# Altium PCB pcb.PcbDoc
Units mm, origin at the board's own origin, x right, y up, seen from the top; angles counter-clockwise.
Board outline 16 x 19.2 mm, 2 copper layers (Top Layer, Bottom Layer), stack 1.18 mm thick; 14 components, 11 nets, 88 pads, 13 vias.
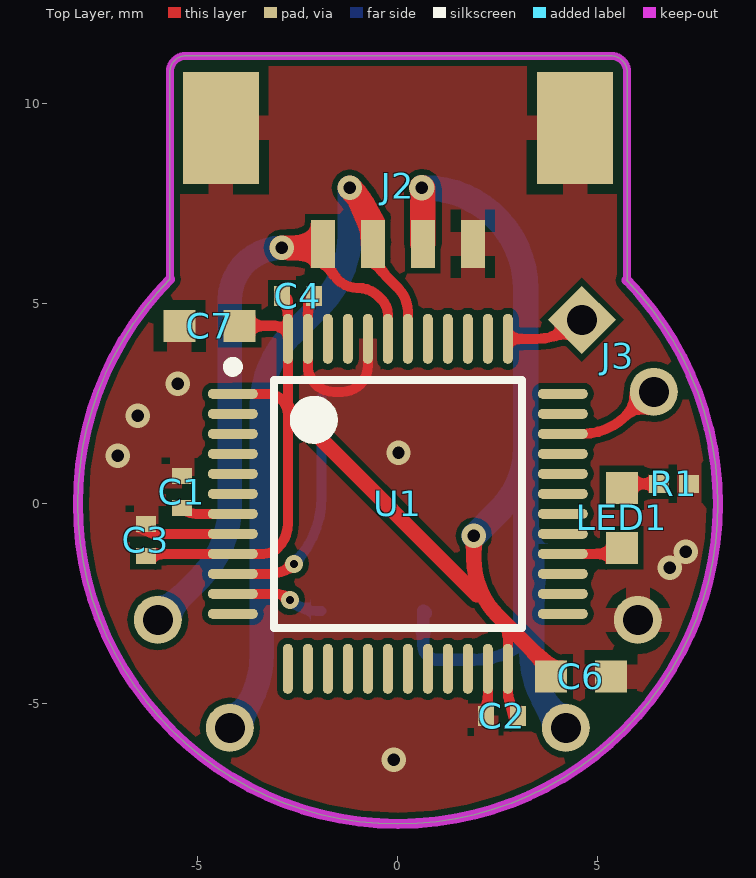
[diagram p0: Top Layer view]
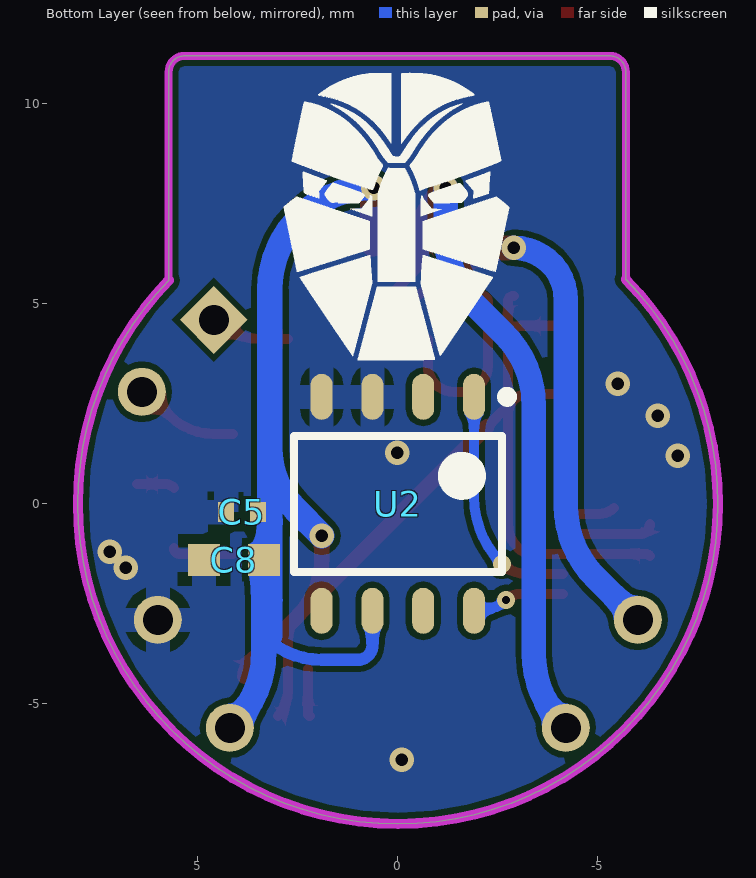
[diagram p1: Bottom Layer view, seen from below]
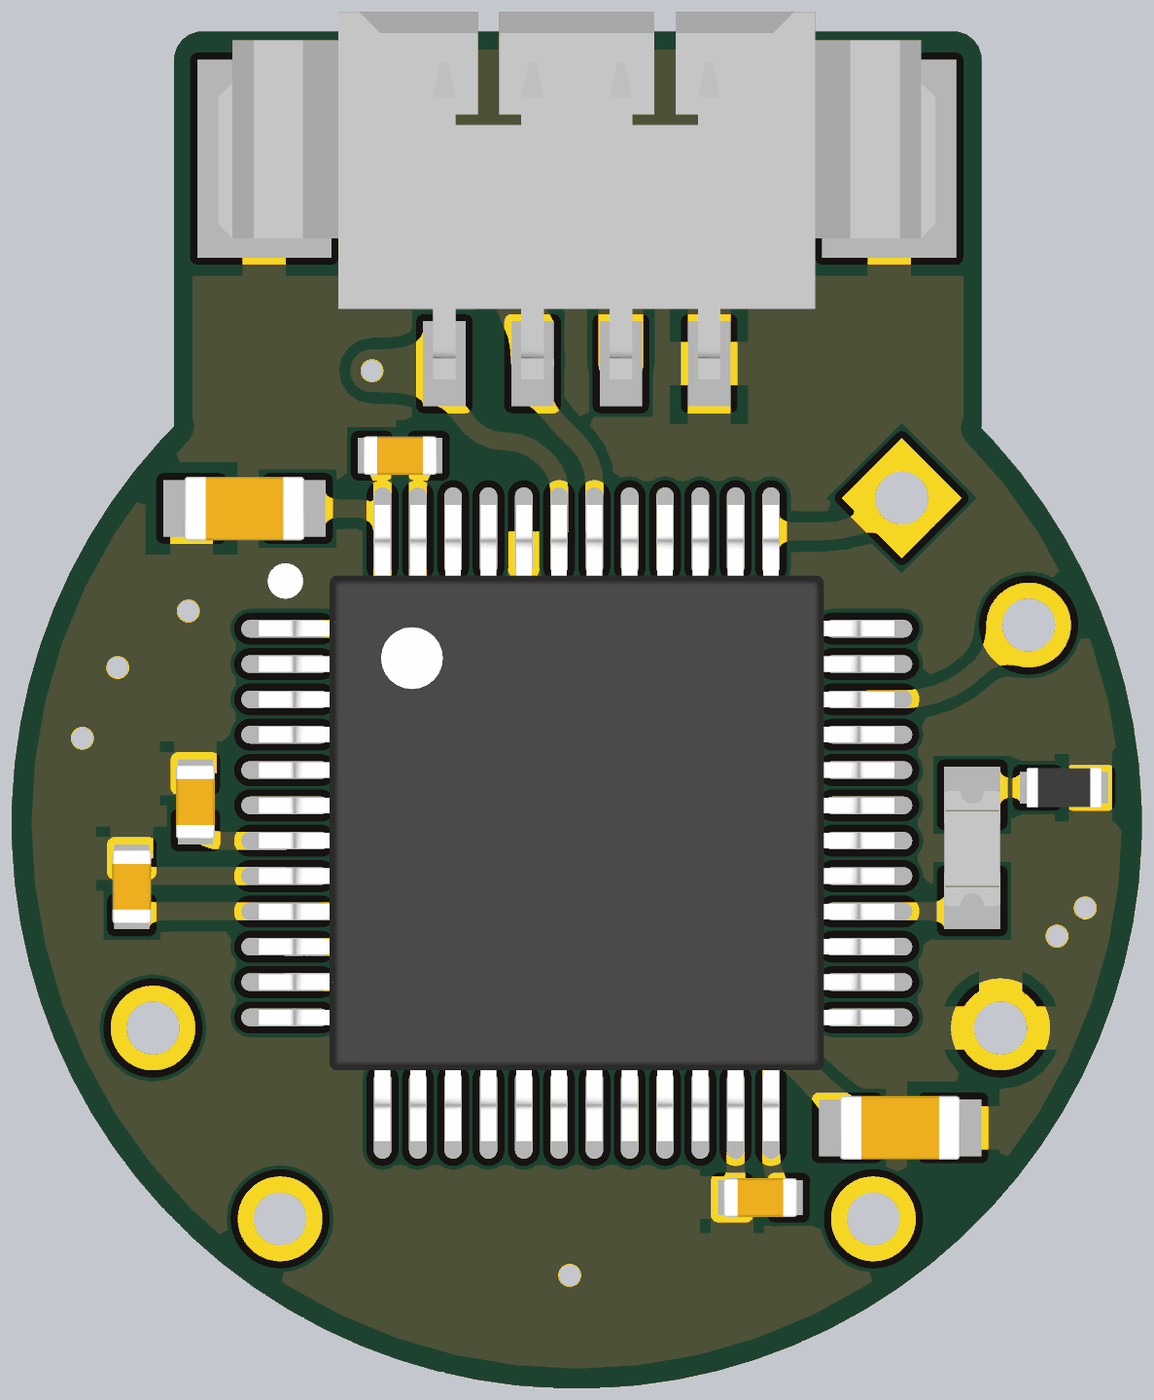
[diagram p2: 3D render of the assembled board from above, using the file's embedded part models]
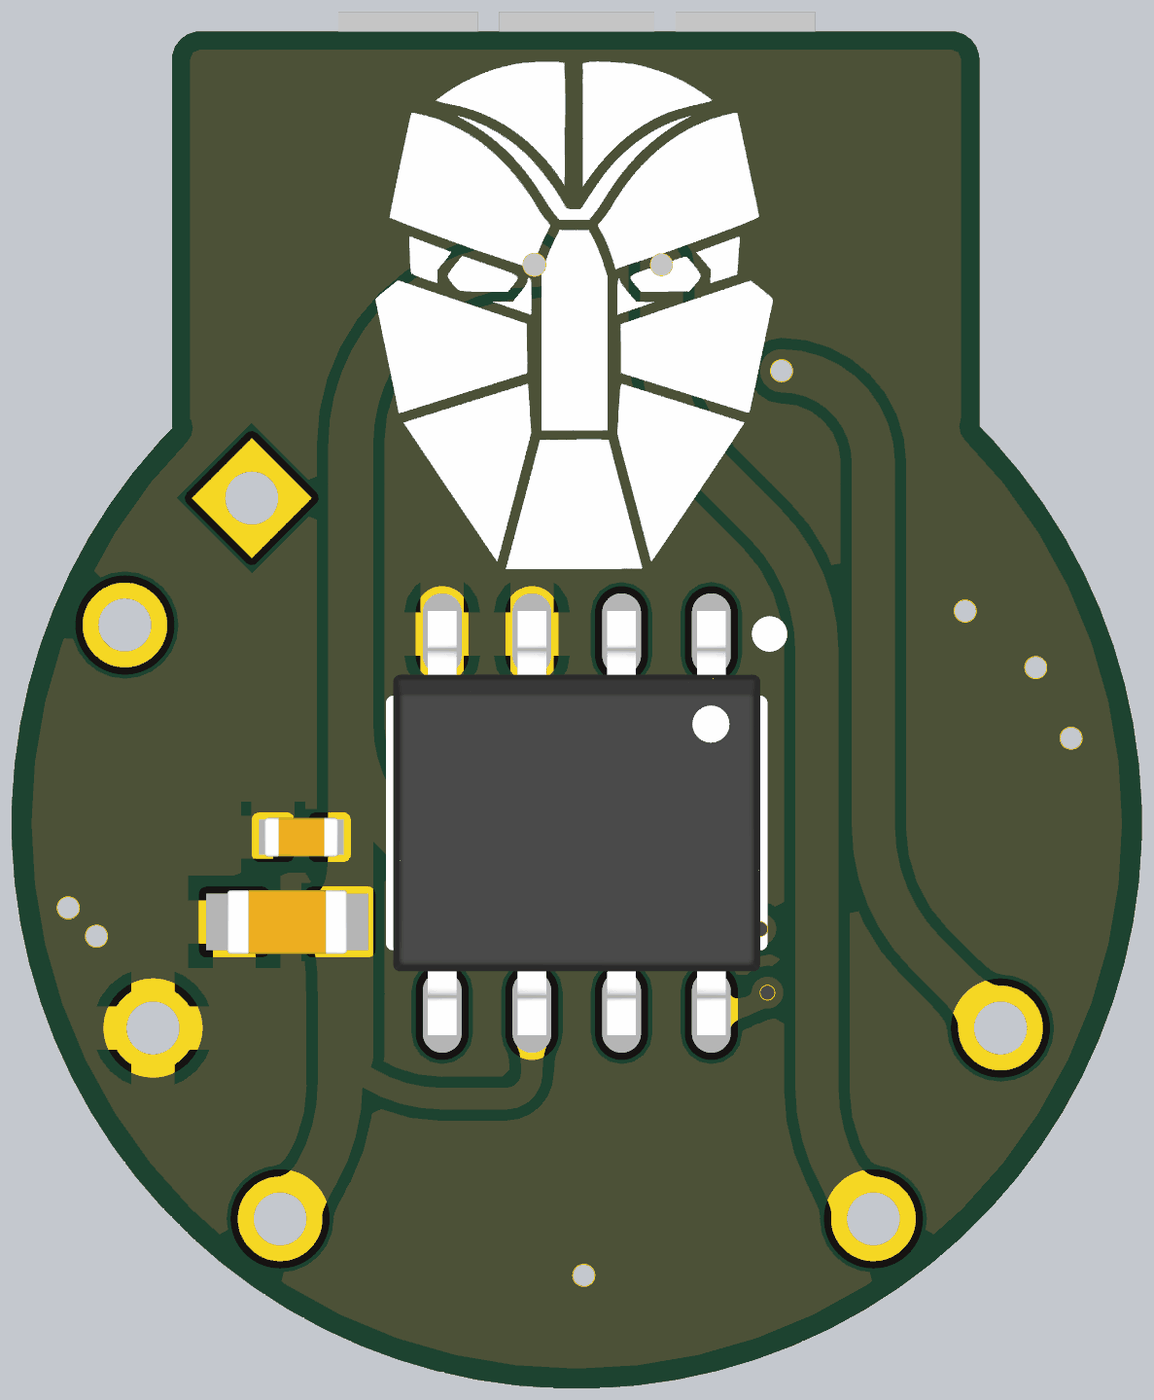
[diagram p3: 3D render of the assembled board from below, using the file's embedded part models]

## Layer stack, top to bottom
Top Solder: solder mask 0.0102, Solder Resist, Dk 3.5
Top Layer: signal copper 0.0356
Dielectric 1: dielectric 1.1086, FR-4, Dk 4.8
Bottom Layer: signal copper 0.0356
Bottom Solder: solder mask 0.0102, Solder Resist, Dk 3.5

## Board outline
-8,0 cw(c0,0) -5.7,5.613 -5.7,10.8 cw(c-5.3,10.8) -5.3,11.2 5.331,11.2 cw(c5.331,10.8) 5.731,10.8 5.731,5.6 5.722,5.591 cw(c0,0) 8,0 cw(c0,0) 0,-8 cw(c0,0)

## Design rules (kind name [scope] priority, off if disabled: settings)
Clearance [All] p1: gap=0.152 ignorepadtopadclearanceinfootprint=FALSE except(0: Arc-Hole Track-Hole SMDPad-Hole THPad-Hole Via-Hole Fill-Hole Poly-Hole Region-Hole Text-Hole)
MinimumSolderMaskSliver [All] p1 off: minsoldermaskwidth=0.254
PolygonConnect [All] p1: thpad.connectstyle=Relief thpad.reliefconductorwidth=0.61 thpad.reliefentries=4 thpad.polygonreliefangle="90 Angle" thpad.airgapwidth=0.254 smdpad.connectstyle=Relief smdpad.reliefconductorwidth=0.61 smdpad.reliefentries=4 smdpad.polygonreliefangle="90 Angle" smdpad.airgapwidth=0.254 via.connectstyle=Direct via.reliefconductorwidth=0.61 via.reliefentries=4 via.polygonreliefangle="90 Angle" via.airgapwidth=0.254
RoutingVias [All] p1: holewidth=0.711 width=1.27 viastyle="Through Hole" minholewidth=0.2 minwidth=0.45 maxholewidth=0.711 maxwidth=1.27
SilkToSilkClearance [All] p1 off: silktosilkclearance=0.254
SilkToSolderMaskClearance [IsPad] p1 off: minsilkscreentomaskgap=0.254 clearancetoexposedcopper=TRUE
SolderMaskExpansion [All] p1: expansion=0.102 istentingtop=FALSE
Width [All] p1: maxlimit=5.08 minlimit=0.152 preferedwidth=0.254 minimp=50.000000 maximp=50.000000 favimp=50.000000
27 further rules are at their usual default settings.

## Components (designator, comment, footprint, x,y, rotation, side; value= is the part's Value field where it differs from the comment)
C1 "100nF" c0402 -5.4,0.3 r90 top
C2 "100nF" c0402 2.6,-5.3 r180 top
C3 "100nF" c0402 -6.3,-0.9 r90 top
C4 "100nF" c0402 -2.5,5.2 r0 top
C5 "100nF" c0402 3.9,-0.2 r0 bottom
C6 "4.7uF" C0603 4.578,-4.312 r180 top
C7 "4.7uF" C0603 -4.705,4.451 r0 top
C8 "4.7uF" C0603 4.1,-1.4 r180 bottom
J2 "0532610471" 0532610471 0,6.5 r180 top
J3 "PIN-DUAL" PAD-DOUBLE 5.5,3.7 r315 top
LED1 "VLMTG1400-GS08" LED_0603 5.6,-0.362 r270 top
R1 "470" R0402 6.9,0.5 r0 top
U1 "STM32F030C6T6" LQFP48 0,0 r0 top locked
U2 "TLE5009E1000FUMA1" SOIC127P600X175-8L 0,0 r270 bottom

## Footprints (in the part's own frame and the unit in brackets; to place one, negate y for a bottom-side part, rotate by r counter-clockwise, add the part's x,y. Pads: shape width x height; smd on the part's side, far side on the other; paste and mask are expansions set on the pad)
0532610471 [mm]
  rect 0.6x1.2 smd: 1(1.875,0) 2(0.625,0) 3(-0.625,0) 4(-1.875,0)
  rect 1.9x2.8 smd: 5(4.425,-2.9) 6(-4.425,-2.9)
  body extent -5.07,-4.98 5.07,0.22, height 3.39
c0402 [mm] "Chip Capacitor, 2-Leads, Body 1.00x0.50mm, IPC Medium Density"
  rect 0.4x0.5 smd: 1(-0.4,0) 2(0.4,0)
  body extent -0.53,-0.28 0.53,0.28, height 0.55
C0603 [mm] "Chip Capacitor, 2-Leads, Body 1.60x0.80mm, IPC Medium Density"
  rect 0.8x0.8 smd: 1(-0.75,0) 2(0.75,0)
  body extent -0.85,-0.45 0.85,0.45, height 0.9
LED_0603 [mil]
  rect 31.5x31.5 smd: A(29.06,0) C(-30,0)
  body extent -32,-15 32,16, height 28
LQFP48 [mm] "QFP, 48-Leads, Body 7x7mm, Pitch 0.5mm, IPC Medium Density"
  oval 1.25x0.25 smd: 1(-4.125,2.75) 2(-4.125,2.25) 3(-4.125,1.75) 4(-4.125,1.25) 5(-4.125,0.75) 6(-4.125,0.25) 7(-4.125,-0.25) 8(-4.125,-0.75) 9(-4.125,-1.25) 10(-4.125,-1.75) 11(-4.125,-2.25) 12(-4.125,-2.75) 25(4.125,-2.75) 26(4.125,-2.25) 27(4.125,-1.75) 28(4.125,-1.25) 29(4.125,-0.75) 30(4.125,-0.25) 31(4.125,0.25) 32(4.125,0.75) 33(4.125,1.25) 34(4.125,1.75) 35(4.125,2.25) 36(4.125,2.75)
  oval 0.25x1.25 smd: 13(-2.75,-4.125) 14(-2.25,-4.125) 15(-1.75,-4.125) 16(-1.25,-4.125) 17(-0.75,-4.125) 18(-0.25,-4.125) 19(0.25,-4.125) 20(0.75,-4.125) 21(1.25,-4.125) 22(1.75,-4.125) 23(2.25,-4.125) 24(2.75,-4.125) 37(2.75,4.125) 38(2.25,4.125) 39(1.75,4.125) 40(1.25,4.125) 41(0.75,4.125) 42(0.25,4.125) 43(-0.25,4.125) 44(-0.75,4.125) 45(-1.25,4.125) 46(-1.75,4.125) 47(-2.25,4.125) 48(-2.75,4.125)
  silkscreen extent -4.25,-3.1 3.1,3.55, body extent -4.5,-4.5 4.5,4.5, height 1.6
PAD-DOUBLE [mm]
  rect 1.2x1.2 hole 0.75: 1(-1.27,0)
  round 1.2 hole 0.75: 2(1.27,0)
R0402 [mm] "Chip Resistor, 2-Leads, Body 1.00x0.50mm, IPC High Density"
  rect 0.5x0.45 smd: 1(-0.375,0) 2(0.375,0)
  body extent -0.52,-0.27 0.53,0.28, height 0.5
SOIC127P600X175-8L [mm] "SOIC, 8-Leads, Body 5.00x4.00mm, Pitch 1.27mm, IPC High Density"
  oval 1.15x0.55 smd: 1(-2.675,1.905) 2(-2.675,0.635) 3(-2.675,-0.635) 4(-2.675,-1.905) 5(2.675,-1.905) 6(2.675,-0.635) 7(2.675,0.635) 8(2.675,1.905)
  silkscreen extent -2.8,-2.6 1.7,2.85, body extent -3,-2.6 3,2.6, height 1.75

## Part data
C1 C2 C3 C4 C5: library part C0402-100nF, "SAMSUNG ELECTRO-MECHANICS - CL05F104ZO5NNNC - SMD Multilayer Ceramic Capacitor, 0.1 µF, 16 V, 0402 [1005 Metric], +80%, -20%, Y5V, CL Series", Case Code (Imperial)=0402, Case Code (Metric)=1005, Dielectric=Y5V, Manufacturer=Samsung, Manufacturer Part Number=CL05F104ZO5NNNC, Max Operating Temperature=85°C, Min Operating Temperature=-30°C, Supplier Part Number 1=1276-1004-1-ND, Tolerance=80%, Voltage Rating=16V, Capacitance=100nF, Case/Package=0402, Category="Ceramic Capacitors", ComponentLink1Description=https://datasheet.ciiva.com/16199/cl05f104zo5nnnc-16199056.pdf?src-supplier=Future+Electronics, ComponentLink1URL=https://datasheet.ciiva.com/16199/cl05f104zo5nnnc-16199056.pdf?src-supplier=Future+Electronics, ComponentLink2Description=https://datasheet.ciiva.com/15195/getdatasheetpartid-358403-15195703.pdf?src-supplier=Verical, ComponentLink2URL=https://datasheet.ciiva.com/15195/getdatasheetpartid-358403-15195703.pdf?src-supplier=Verical, ComponentLink3Description=https://datasheet.ciiva.com/29198/458504-da-01-en-vs-kondensator-0402-29198386.pdf?src-supplier=Conrad, ComponentLink3URL=https://datasheet.ciiva.com/29198/458504-da-01-en-vs-kondensator-0402-29198386.pdf?src-supplier=Conrad, Contact Plating=Tin, Depth=0.5mm, Height=0.5mm, Length=1mm, Material=Ceramic, Mount="Surface Mount", Packaging="Tape and Reel", Pricing 1="1=0.10000, 10=0.01900, 50=0.01040, 100=0.00850, 500=0.00604, 1000=0.00475, 2500=0.00432, 5000=0.00397 (USD)", Radiation Hardening=No, RoHS=Yes, Stock 1=4278518, Supplier 1=Digi-Key, Thickness=0.022inch, Width=0.02inch
C6 C7 C8: library part C0603-4.7uF, "Cap Ceramic 4.7uF 6.3VDC X5R 10% SMD 0603 Paper T/R", Case Code (Imperial)=0603, Case Code (Metric)=1608, Dielectric=X5R, Manufacturer=Samsung, Manufacturer Part Number=CL10A475KQ8NNNC, Max Operating Temperature=85°C, Min Operating Temperature=-55°C, Package Quantity=1, Supplier Part Number 1=1276-1045-1-ND, Tolerance=20%, Voltage=6.3V, Capacitance=4.7uF, Case/Package=0603, Category="Ceramic Capacitors", ComponentLink1Description=https://datasheet.ciiva.com/15195/getdatasheetpartid-358620-15195714.pdf?src-supplier=Verical, ComponentLink1URL=https://datasheet.ciiva.com/15195/getdatasheetpartid-358620-15195714.pdf?src-supplier=Verical, ComponentLink2Description=https://datasheet.ciiva.com/29198/457675-da-01-en-vs-kondensator-0603-29198672.pdf?src-supplier=Conrad, ComponentLink2URL=https://datasheet.ciiva.com/29198/457675-da-01-en-vs-kondensator-0603-29198672.pdf?src-supplier=Conrad, ComponentLink3Description=https://datasheet.ciiva.com/16437/cl05b104kq5nnnc-16437321.pdf?src-supplier=Future+Electronics, ComponentLink3URL=https://datasheet.ciiva.com/16437/cl05b104kq5nnnc-16437321.pdf?src-supplier=Future+Electronics, Contact Plating=Tin, Depth=0.8mm, Height=0.8mm, Length=1.6mm, Material=Ceramic, Mount="Surface Mount", Packaging="Tape and Reel", Pricing 1="1=0.10000, 10=0.04500, 50=0.02480, 100=0.02030, 500=0.01448, 1000=0.01137 (USD)", Radiation Hardening=No, RoHS=Yes, Stock 1=1192818, Supplier 1=Digi-Key, Thickness=0.035inch, Voltage Rating=6.3V, Width=0.031inch
J2: "Headers & Wire Housings 1.25MM HDR 4 CKT Right-Angle", Color=Beige, Contact Resistance=20mR, Current Rating=1A, Flammability Rating="UL94 V-0", Insulation Resistance=100MR, Manufacturer=Molex, Manufacturer Part Number=53261-0471, Max Operating Temperature=85°C, Min Operating Temperature=-40°C, Package Quantity=1000, Supplier Part Number 1=WM7622DKR-ND, Voltage Rating=125V, ComponentLink1Description=http://www.mouser.com/ds/2/276/0532610471_PCB_HEADERS-170942.pdf, ComponentLink1URL=http://www.mouser.com/ds/2/276/0532610471_PCB_HEADERS-170942.pdf, ComponentLink2Description=http://uk.rs-online.com/webdocs/1380/0900766b8138010d.pdf, ComponentLink2URL=http://uk.rs-online.com/webdocs/1380/0900766b8138010d.pdf, ComponentLink3Description=http://www.farnell.com/datasheets/1867384.pdf, ComponentLink3URL=http://www.farnell.com/datasheets/1867384.pdf, ComponentLink4Description=http://www.molex.com/webdocs/datasheets/pdf/en-us/0532610471_PCB_HEADERS.pdf, ComponentLink4URL=http://www.molex.com/webdocs/datasheets/pdf/en-us/0532610471_PCB_HEADERS.pdf, ComponentLink5Description=https://www.alliedelec.com/m/d/74d14d19c60ab078e4881c4c1bd42ef7.pdf, ComponentLink5URL=https://www.alliedelec.com/m/d/74d14d19c60ab078e4881c4c1bd42ef7.pdf, ComponentLink6Description=http://www.jameco.com/Jameco/Products/ProdDS/1932555.pdf, ComponentLink6URL=http://www.jameco.com/Jameco/Products/ProdDS/1932555.pdf, Contact Material=Bronze,Tin, Contact Plating=Tin, Description 1="Headers & Wire Housings 1.25MM HDR 4 CKT Right-Angle", Gender=Male, Glow Wire Compliant=Non-compliant, Housing Material=Thermoplastic, Lead Free="Lead Free", Lead Pitch=1.25mm, Mount="Surface Mount", Number of Circuits=4, Number of Contacts=4, Number of Positions=4, Number of Rows=1, Orientation="Right Angle", Packaging="Tape and Reel", Pitch=1.25mm, Pricing="1=1.24, 10=1.089, 100=0.9397, 500=0.76884 (USD)", Radiation Hardening=No, REACH SVHC=Unknown, Stock=42057, Supplier 1=Digi-Key, Termination=SMD/SMT, Voltage Rating (AC)=125V, Voltage Rating (DC)=125V, Working Voltage=125V
LED1: "LED GREEN 0603 SMD", Case Code (Imperial)=0603, Case Code (Metric)=1608, Color=Green, Forward Voltage=2.85V, Manufacturer=Vishay, Supplier Part Number 1=VLMTG1400-GS08CT-ND, Test Current=20mA, Case/Package=0603, Category=LEDs, ComponentLink1Description=http://www.farnell.com/datasheets/2614507.pdf?src-supplier=Farnell, ComponentLink1URL=http://www.farnell.com/datasheets/2614507.pdf?src-supplier=Farnell, ComponentLink2Description=http://www.vishay.com/docs/84393/vlmtg1400.pdf?src-supplier=Digi-Key, ComponentLink2URL=http://www.vishay.com/docs/84393/vlmtg1400.pdf?src-supplier=Digi-Key, Dominant Wavelength=525nm, Height=0.65mm, Length=1.6mm, Lens Size=0.8mm, Lens Style=Flat, Luminous Intensity=1400mcd, Manufacturer Part Number=VLMTG1400-GS08, Mount="Surface Mount", Packaging="Cut Tape", Pricing 1="1=0.48000, 10=0.34300, 100=0.22400, 500=0.16100, 1000=0.12600 (USD)", RoHS=No, Stock 1=1146, Supplier 1=Digi-Key, Viewing Angle=146°, Width=0.8mm
R1: library part RC0402JR-07470RL, "RES 680 OHM 5% 1/16W 0402", Case Code (Imperial)=0402, Case Code (Metric)=1005, Manufacturer=Yageo, Max Operating Temperature=155°C, Max Power Dissipation=63mW, Min Operating Temperature=-55°C, Package Quantity=1, Power Rating=62.5mW, Resistance=470R, Supplier Part Number 1=311-470JRDKR-ND, Temperature Coefficient=100ppm/°C, Tolerance=5%, Voltage Rating=50V, Case/Package=0402, Category="Chip SMD Resistors", ComponentLink1Description=http://www.yageo.com/documents/recent/PYu-RC_Group_51_RoHS_L_10.pdf?src-supplier=Digi-Key, ComponentLink1URL=http://www.yageo.com/documents/recent/PYu-RC_Group_51_RoHS_L_10.pdf?src-supplier=Digi-Key, ComponentLink2Description=http://www.farnell.com/datasheets/1018594.pdf?src-supplier=Element14, ComponentLink2URL=http://www.farnell.com/datasheets/1018594.pdf?src-supplier=Element14, ComponentLink3Description=http://www.mouser.com/ds/2/447/PYu-RC0402_51_RoHS_L_6_r-8721.pdf?src-supplier=Mouser, ComponentLink3URL=http://www.mouser.com/ds/2/447/PYu-RC0402_51_RoHS_L_6_r-8721.pdf?src-supplier=Mouser, ComponentLink4Description=https://www.seielect.com/catalog/SEI-Packaging.pdf?src-supplier=Digi-Key, ComponentLink4URL=https://www.seielect.com/catalog/SEI-Packaging.pdf?src-supplier=Digi-Key, ComponentLink5Description=https://www.seielect.com/catalog/SEI-RMCF_RMCP.pdf?src-supplier=Avnet, ComponentLink5URL=https://www.seielect.com/catalog/SEI-RMCF_RMCP.pdf?src-supplier=Avnet, ComponentLink6Description=http://www.seielect.com/Catalog/SEI-RMC.pdf?src-supplier=Future+Electronics, ComponentLink6URL=http://www.seielect.com/Catalog/SEI-RMC.pdf?src-supplier=Future+Electronics, Composition="Thick Film", Contact Plating=Tin,Matte, Depth=0.5mm, Description 1="RES SMD 470 OHM 5% 1/16W 0402", Features="Moisture Resistant", Height=0.016inch, Lead Free="Lead Free", Length=1mm, Manufacturer Part Number=RC0402JR-07470RL, Military Standard=Not, Mount="Surface Mount", Number of Terminations=2, Packaging="Tape and Reel", Pricing="1=0.1, 10=0.013, 100=0.0055, 1000=0.00245, 2500=0.00212, 5000=0.00176 (USD)", Pricing 2="1=0.10000, 10=0.01100, 100=0.00450, 1000=0.00204, 2500=0.00177, 5000=0.00146 (USD)", Radiation Hardening=No, REACH SVHC=Unknown, RoHS=Yes, Stock=2903670, Stock 2=241664, Supplier 1=Digi-Key, Supplier 2=Digi-Key, Supplier Part Number 2=RMCF0402JT680RCT-ND, Termination=SMD/SMT, Width=0.02inch, Working Voltage=50V
U1: "STMICROELECTRONICS - STM32F030C6T6 - ARM MCU, Value Line, STM32 Family STM32F0 Series Microcontrollers, ARM Cortex-M0, 32bit, 48 MHz - ARM MCU, Value Line, STM32 Family STM32F0 Series Microcontrollers, ARM Cortex-M0, 32bit, 48 MHz", Case/Package=LQFP, Frequency=48MHz, I/Os (High Current)=39, Manufacturer=STMicroelectronics, Max Operating Temperature=85°C, Max Power Dissipation=364mW, Max Supply Voltage=3.6V, Min Operating Temperature=-40°C, Min Supply Voltage=2.4V, Operating Frequency(F) (Processor speed) (MHz)=48, Package Quantity=250, Supplier Part Number 1=497-14042-ND, Supply Voltage(Vcc) min (V)=2.4, Category=Microcontrollers, ComponentLink1Description="Manufacturer URL", ComponentLink1URL=http://www.st.com/web/en/home.html, ComponentLink2Description=Datasheet, ComponentLink2URL=http://www.st.com/st-web-ui/static/active/en/resource/technical/document/datasheet/DM00088500.pdf, ComponentLink3Description="Package Specification", ComponentLink3URL=http://www.st.com/st-web-ui/static/active/en/resource/technical/document/datasheet/DM00058181.pdf, ComponentLink4Description=https://datasheet.ciiva.com/29720/dm00088500-29720640.pdf?src-supplier=Avnet, ComponentLink4URL=https://datasheet.ciiva.com/29720/dm00088500-29720640.pdf?src-supplier=Avnet, ComponentLink5Description=https://datasheet.ciiva.com/28647/1883133-28647788.pdf?src-supplier=Element14, ComponentLink5URL=https://datasheet.ciiva.com/28647/1883133-28647788.pdf?src-supplier=Element14, Contact Plating=Tin,Matte, Core="ARM Cortex-M0", Core Architecture=ARM, Data Bus Width=32b, DatasheetVersion="Rev. 1", FLASH Size (Prog) (kB)=32, Height=1.45mm, Interface=I2C,SPI,UART,USART, Internal RAM Size (kB)=4, Lead Free="Lead Free", Length=7.2mm, Manufacturer Part Number=STM32F030C6T6, Max Frequency=48MHz, Memory Size=32KB, Memory Type=FLASH, Mounting Technology="Surface Mount", Number of ADC Channels=16, Number of I2C Channels=1, Number of I/Os=39, Number of Pins=48, Number of Programmable I/O=39, Number of PWM Channels=6, Number of SPI Channels=1, Number of Timers/Counters=5, Oscillator Type=Internal, PackageDescription="48-Pin Low Profile Quad Flat Package, 7 x 7 mm Body, 0.5 mm Pitch", PackageReference=LQFP48, PackageVersion="Rev. 6, 06/2013", Packaging=Tray, Packing=Tray, PartNumber=STM32F030C6T6, Peripherals=POR,PWM,WDT,DMA, Pricing 1="1=1.48000, 10=1.32900, 25=1.25400, 100=1.06840, 250=1.00320, 500=0.87780, 1000=0.72732, 2500=0.67716, 5000=0.65208 (USD)", Radiation Hardening=No, RAM Size=4KB, REACH SVHC="No SVHC", RoHS=Yes, Stock 1=262, Supplier 1=Digi-Key, Supplier 2=Newark, Supplier 3=Mouser, Supplier Part Number 2=06X3646, Supplier Part Number 3=511-STM32F030C6T6, Watchdog Timer=Yes, Width=7.2mm
U2: "RotaryPosition Sensor 5.5V Automotive 8-Pin DSO Tape and Reel", Case/Package=SMD/SMT, Manufacturer=Infineon, Max Operating Temperature=150°C, Min Operating Temperature=-40°C, Operating Supply Voltage=3.3V, Supplier Part Number 1=TLE5009E1000FUMA1CT-ND, Category=Sensors, ComponentLink1Description=http://components.arrow.com/part/dataview/52121057S8968538N2051?src-supplier=Arrow, ComponentLink1URL=http://components.arrow.com/part/dataview/52121057S8968538N2051?src-supplier=Arrow, ComponentLink2Description=http://components.arrow.com/part/dataview/0323_03444430?src-supplier=Arrow+Europe, ComponentLink2URL=http://components.arrow.com/part/dataview/0323_03444430?src-supplier=Arrow+Europe, ComponentLink3Description=http://www.infineon.com/dgdl/Infineon-TLE5009_FDS-DS-v01_01-en.pdf?fileId=db3a304330f686060131421d8ddd56b0&src-supplier=Digi-Key, ComponentLink3URL=http://www.infineon.com/dgdl/Infineon-TLE5009_FDS-DS-v01_01-en.pdf?fileId=db3a304330f686060131421d8ddd56b0&src-supplier=Digi-Key, ComponentLink4Description=http://www.infineon.com/dgdl/TLE5009_PDS_Rev0.9.pdf?folderId=db3a30431ce5fb52011d3dd6e8012582&fileId=db3a304330f686060131421d8ddd56b0&src-supplier=Avnet, ComponentLink4URL=http://www.infineon.com/dgdl/TLE5009_PDS_Rev0.9.pdf?folderId=db3a30431ce5fb52011d3dd6e8012582&fileId=db3a304330f686060131421d8ddd56b0&src-supplier=Avnet, Halogen Free="Not Halogen Free", Interface=Analog, Lead Free="Lead Free", Manufacturer Part Number=TLE5009E1000FUMA1, Mount="Surface Mount", Number of Pins=8, Pricing 1="1=3.40000, 5=3.15600, 10=2.62200, 25=2.18480, 50=1.94220, 100=1.84510, 500=1.55372, 1000=1.45662 (USD)", RoHS=Yes, Sensing Method=Magnetoresistive, Stock 1=2450, Supplier 1=Digi-Key, Termination=SMD/SMT

## Free pads (board coordinates)
  round 1.2 hole 0.75: 1(-4.2,-5.6) 2(-6,-2.9) 3(4.2,-5.6) 4(6,-2.9)

## Via types
v1: diameter 0.61, hole 0.305, Top Layer to Bottom Layer, tented both sides, 10 vias
v2: diameter 0.45, hole 0.2, Top Layer to Bottom Layer, tented both sides, 2 vias
v3: diameter 0.635, hole 0.318, Top Layer to Bottom Layer, tented both sides, 1 vias

## Nets (pads, with @x,y where several pads share a name; then routed paths per layer and width w, separated by ;. In a path a pad name is that pad's centre, name@x,y a point inside that pad or via, vN(x,y) a via of type N, cw(c..) or ccw(c..) an arc to the next point about the centre after c; other vN are vias at no path point)
3V3: C2.1 C3.1 C4.1 C5.1 C6.2 C7.2 C8.2 J2.3 pad.3 U1.1 U1.9 U1.24 U1.48 U2.6 | length 51.7
  Top Layer w0.254: C3.1 cw(c-6.179,-1.421) -6.179,-1.25 U1.9 -3.362,-1.25 ccw(c-3.362,-0.738) -3,-1.1 ccw(c-3.604,-0.496) -2.75,-0.496 -2.75,2.238 ; U1.1 -3.262,2.75 cw(c-3.262,2.238) -2.9,2.6 cw(c-3.262,2.238) -2.75,2.238 ; C7.2 -3.076,4.451 cw(c-3.076,4.125) U1.48 ; C4.1 cw(c-2.9,5.05) -2.75,5.05 U1.48 ; -2.231,1.93 -2.665,2.363 cw(c-2.461,2.568) -2.75,2.568 ; 2.499,-2.801 cw(c1.892,-3.407) 2.75,-3.407 U1.24 2.75,-4.696 ccw(c3.604,-4.696) C2.1 ; -2.75,2.238 -2.75,2.568 ; -2.75,2.568 U1.48
  Top Layer w0.381: -2.231,1.93 1.971,-2.273 ; v1(1.9,-0.8) 1.9,-1.355 ccw(c3.944,-1.355) 2.071,-2.173 ccw(c3.944,-1.355) 2.499,-2.801 3.699,-4.001 cw(c3.388,-4.312) C6.2
  Top Layer w0.635: v3(0.6,7.9) cw(c0.6,7.875) 0.625,7.875 J2.3
  Bottom Layer w0.305: U2.6@0.7,-2.74 ccw(c0.635,-2.74) U2.6 0.635,-3.535 ccw(c1,-3.535) 1,-3.9 1.901,-3.9 ccw(c1.901,-1.851) 3.181,-3.452 ccw(c1.901,-1.851) 3.35,-3.3
  Bottom Layer w0.635: v3(0.6,7.9) 0.66,7.9 cw(c0.66,5.36) 3.2,5.36 3.2,1.4 ; v1(1.9,-0.8) 2.564,-0.136 ccw(c1.027,1.4) 3.2,1.4 ; 3.2,-3.3 3.2,1.4 ; C8.2 3.35,-3.3 3.35,-3.698 ccw(c5.89,-3.698) 4.094,-5.494 pad.3
COS: U1.10 U2.1 | length 6
  Top Layer w0.254: U1.10 -3.204,-1.75 ccw(c-3.204,-0.896) v2(-2.6,-1.5)
  Bottom Layer w0.254: v2(-2.6,-1.5) ccw(c-4.278,0.178) -1.905,0.178 U2.1
GND: C1.2 C2.2 C3.2 C4.2 C5.2 C6.1 C7.1 C8.1 J2.4 J2.5 J2.6 pad.4 R1.2 U1.8 U1.23 U1.44 U1.47 U2.3 U2.4 | length 8.3
  Top Layer w0.254: C3.2 ccw(c-6.05,-0.5) -6.05,-0.75 U1.8 ; C4.2 ccw(c-2.1,5.05) -2.25,5.05 U1.47 -2.25,3.45 ccw(c-1.6,3.45) -1.6,2.8 -1.4,2.8 ccw(c-1.4,3.45) -0.75,3.45 U1.44 ; C2.2 ccw(c2.2,-5.25) 2.25,-5.25 U1.23
  other v1: -0.1,-6.4 6.8,-1.6 7.2,-1.2 -7,1.2 0.017,1.275 -6.5,2.2 -5.5,3
NetC1_1: C1.1 U1.7 | length 1.3
  Top Layer w0.254: C1.1 ccw(c-5.038,0.262) -5.038,-0.25 U1.7
NetJ3_1: J3.1 U1.37 | length 2
  Top Layer w0.254: U1.37 3.46,4.125 ccw(c3.46,5.74) J3.1
NetJ3_2: J3.2 U1.34 | length 2.7
  Top Layer w0.254: U1.34 4.614,1.75 ccw(c4.614,3.286) 5.7,2.2 J3.2@6.383,2.883
NetLED1_A: LED1.A U1.28 | length 1.6
  Top Layer w0.254: U1.28 5.45,-1.25 ccw(c5.45,-1.1) LED1.A
NetLED1_C: LED1.C R1.1 | length 1
  Top Layer w0.254: LED1.C cw(c5.841,0.159) 5.768,0.492 cw(c5.841,0.159) 5.841,0.5 R1.1
SCL: J2.2 pad.1 U1.42 | length 18.6
  Top Layer w0.254: J2.2 ccw(c0.522,6.5) -0.289,5.689 0,5.4 cw(c-0.604,4.796) 0.25,4.796 U1.42
  Top Layer w0.61: v1(-1.2,7.9) cw(c-2.588,6.512) -0.625,6.512 J2.2
  Bottom Layer w0.61: pad.1 -4.144,-5.544 ccw(c-5.94,-3.748) -3.4,-3.748 -3.4,2.448 cw(c-0.86,2.448) -2.656,4.244 -1.944,4.956 ccw(c-3.74,6.752) -1.9,5.001 ccw(c-3.74,6.752) -1.2,6.752 v1(-1.2,7.9)
SDA: J2.1 pad.2 U1.43 | length 15
  Top Layer w0.254: J2.1 ccw(c-0.608,6.5) -1.504,5.604 -1.5,5.6 ccw(c-1.017,6.083) -1.017,5.4 -1,5.4 cw(c-1,4.676) -0.488,5.188 -0.4,5.1 cw(c-0.762,4.738) -0.25,4.738 U1.43
  Top Layer w0.61: v1(-2.9,6.4) -2.116,6.4 ccw(c-2.116,6.741) J2.1
  Bottom Layer w0.61: pad.2 -4.944,-1.844 ccw(c-6.74,-0.048) -4.2,-0.048 -4.2,5.1 cw(c-2.9,5.1) v1(-2.9,6.4)
SIN: U1.11 U2.8 | length 2.3
  Top Layer w0.254: U1.11 -3.062,-2.25 cw(c-3.062,-2.762) v2(-2.7,-2.4)
  Bottom Layer w0.254: v2(-2.7,-2.4) ccw(c-2.036,-1.736) -2.036,-2.675 U2.8
pads on no net: U1.2 U1.3 U1.4 U1.5 U1.6 U1.12 U1.13 U1.14 U1.15 U1.16 U1.17 U1.18 U1.19 U1.20 U1.21 U1.22 U1.25 U1.26 U1.27 U1.29 U1.30 U1.31 U1.32 U1.33 U1.35 U1.36 U1.38 U1.39 U1.40 U1.41 U1.45 U1.46 U2.2 U2.5 U2.7

## Polygon pours and split planes (outlines as drawn)
GND on Bottom Layer "GND_L02_P001" (solid, remove dead copper, pour order 1): -3.8,15.3 -13.86,15.3 ccw(c-13.86,12.76) -16.4,12.76 -16.4,-10.26 ccw(c-13.86,-10.26) -13.86,-12.8 15.46,-12.8 ccw(c15.46,-10.26) 18,-10.26 18,12.26 ccw(c15.46,12.26) 15.46,14.8 -2.2,14.8
GND on Top Layer "GND_L01_P000" (solid, remove dead copper, pour order 0): -4.3,15 -14.36,15 ccw(c-14.36,12.46) -16.9,12.46 -16.9,-10.56 ccw(c-14.36,-10.56) -14.36,-13.1 14.96,-13.1 ccw(c14.96,-10.56) 17.5,-10.56 17.5,11.96 ccw(c14.96,11.96) 14.96,14.5 -2.7,14.5

## Keep-outs
Keep-Out Layer:
  lines w0.2: -5.7,5.6 -5.7,10.8 cw(c-5.3,10.8) -5.3,11.2 5.331,11.2 cw(c5.331,10.8) 5.731,10.8 5.731,5.6
  lines w0.254: -5.7,5.613 ccw(c0,0) -8,0 ccw(c0,0) 0,-8 ccw(c0,0) 8,0 ccw(c0,0) 5.722,5.591

## Silkscreen, mask and mechanical layers (free items; w line width, h text height)
Bottom Overlay:
  drawing of 17 lines, arcs and shapes, not listed